# Altium PCB boitier_commande.PcbDoc
Units mm, origin at the board's own origin, x right, y up, seen from the top; angles counter-clockwise.
Board outline 299.72 x 199.9 mm, 2 copper layers (Top Layer, Bottom Layer); 59 components, 66 nets, 198 pads, 2 vias.
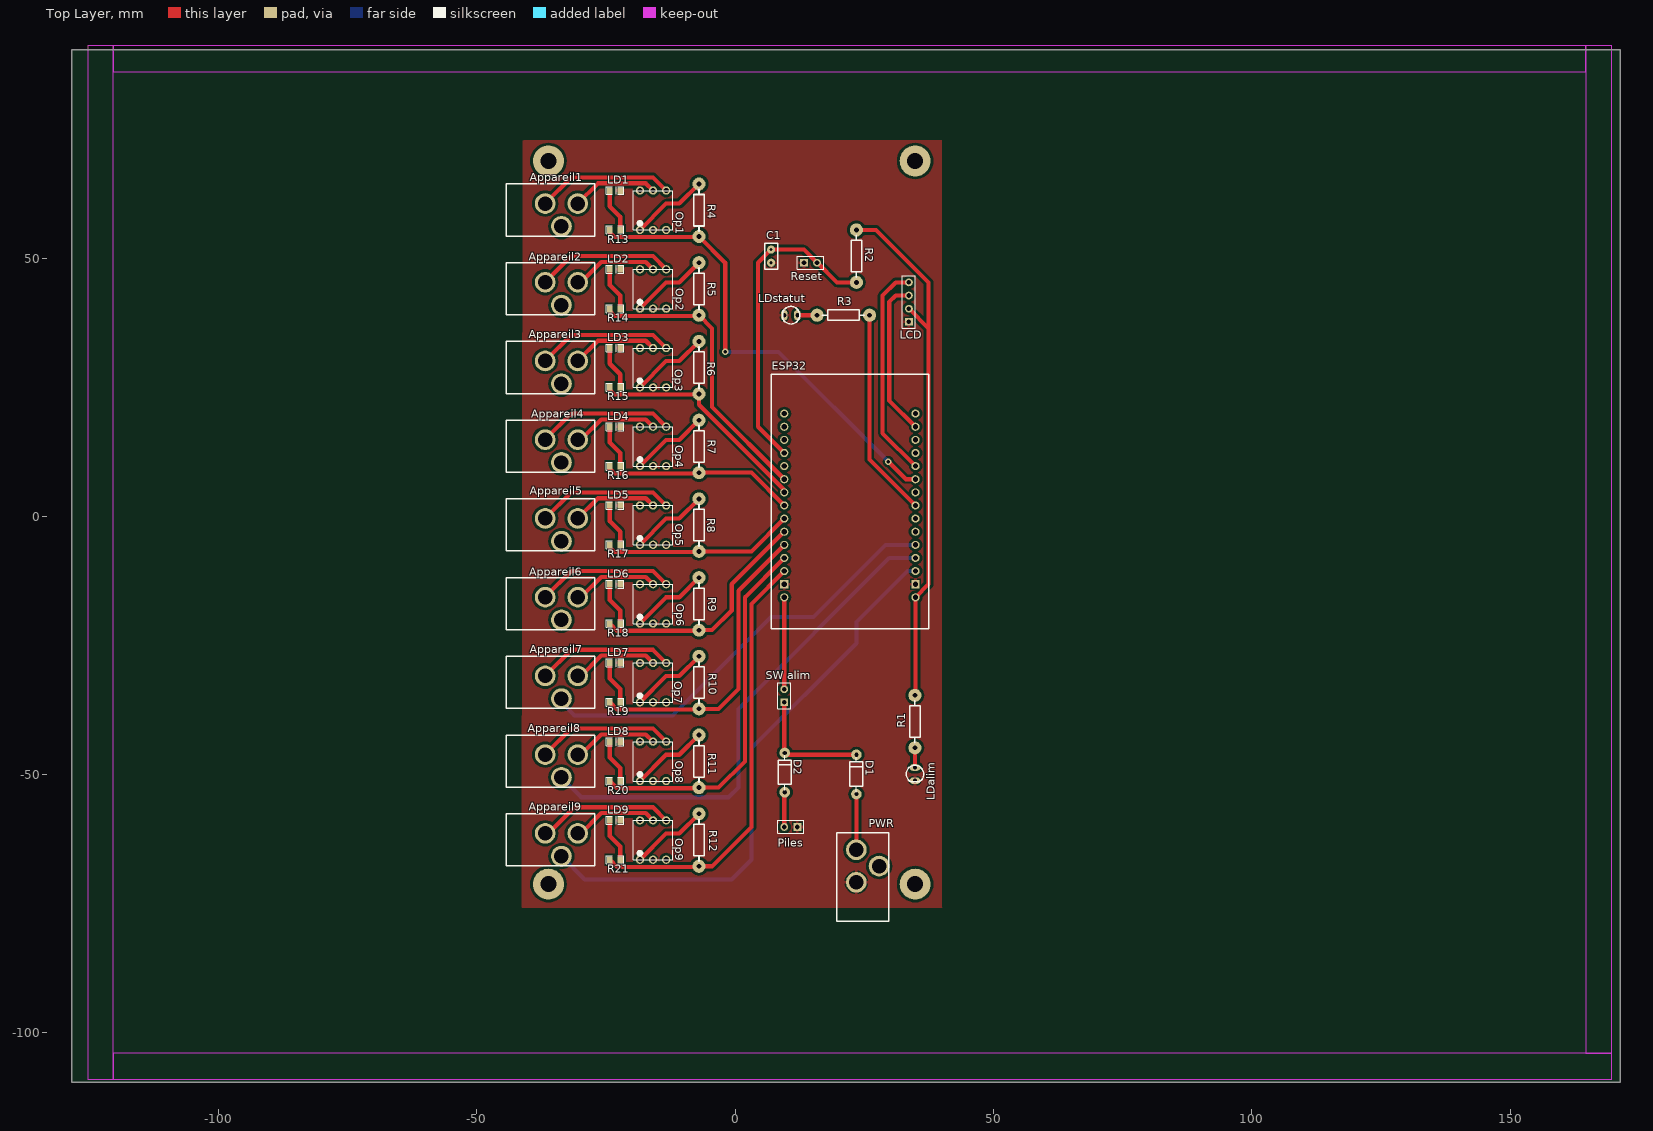
[diagram p0: Top Layer view]
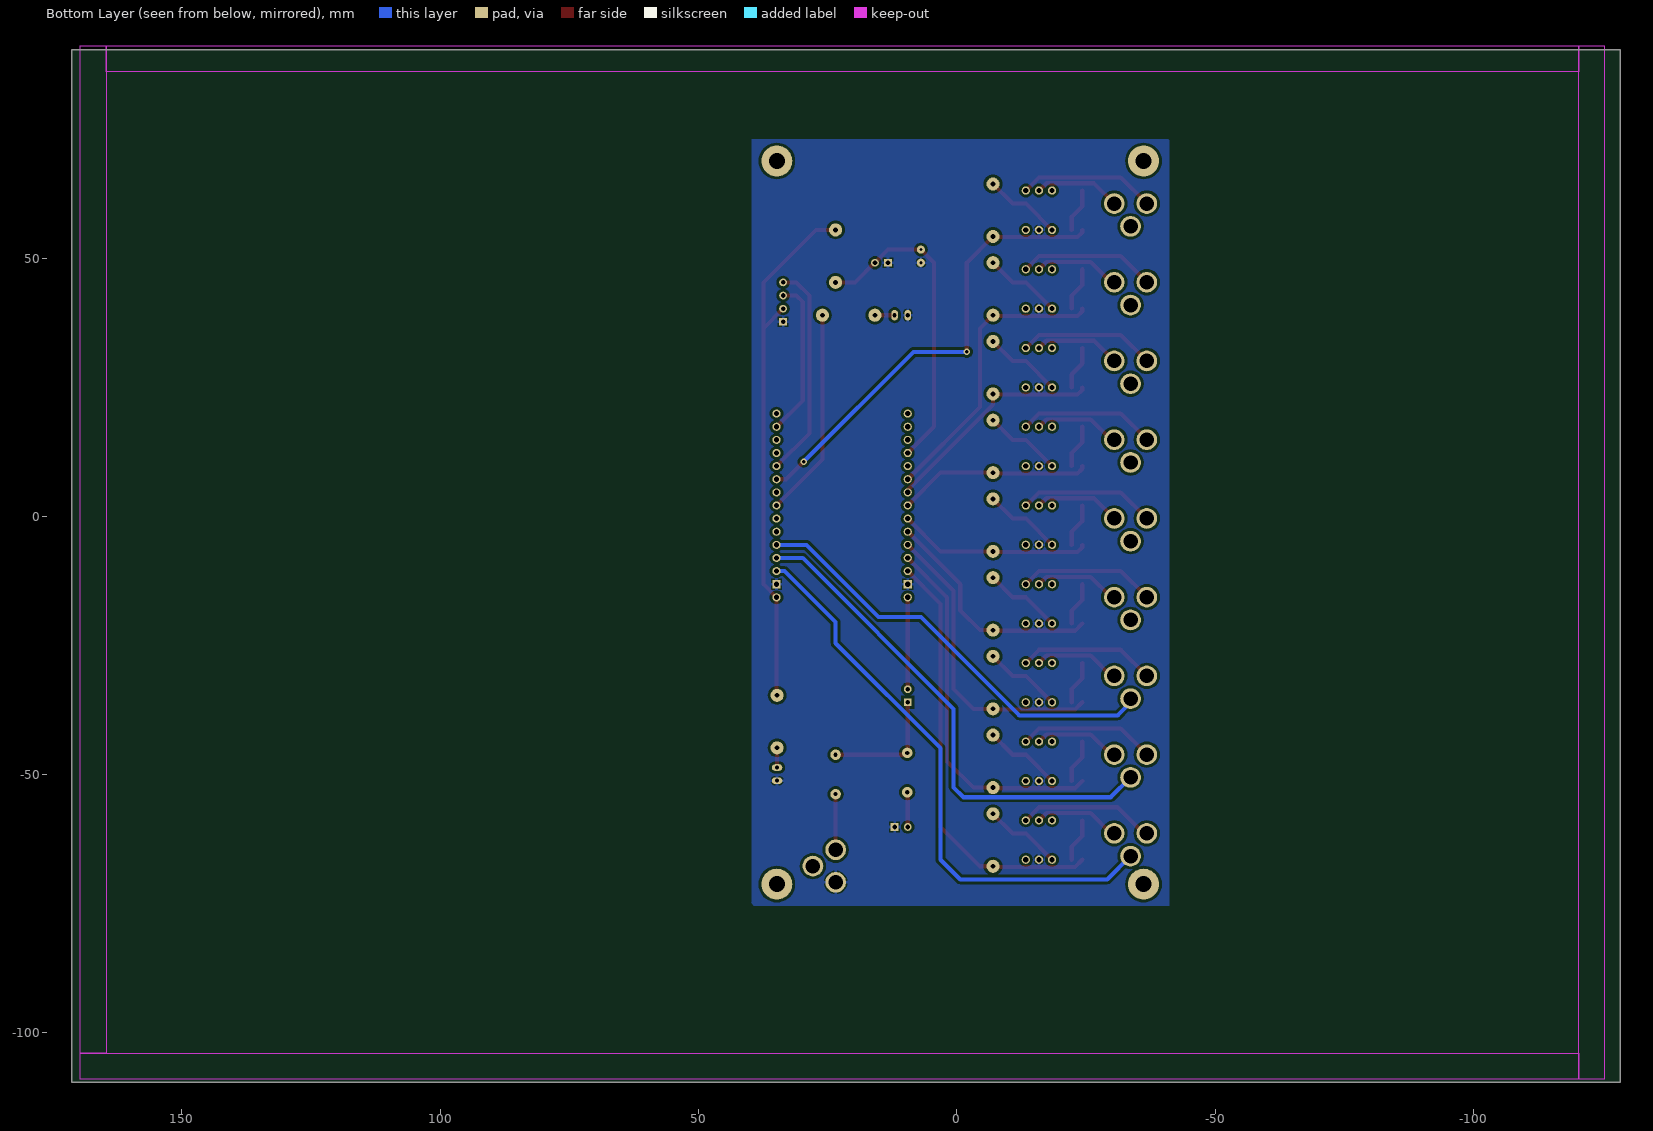
[diagram p1: Bottom Layer view, seen from below]

## Layer stack, top to bottom
Top Solder: solder mask 0.0102, Solder Resist, Dk 3.5
Top Layer: signal copper 0.0356
Dielectric1: dielectric 0.32, FR-4, Dk 4.8
Bottom Layer: signal copper 0.0356
Bottom Solder: solder mask 0.0102, Solder Resist, Dk 3.5

## Board outline
-128.405,-109.59 171.315,-109.59 171.315,90.308 -128.405,90.308

## Design rules (kind name [scope] priority, off if disabled: settings)
Clearance Clearance_bottom_polygon [OnLayer('Bottom Layer') Or OnLayer('Multi-Layer') vs OnLayer('Bottom Layer')  And  InPoly] p1: gap=0.508
Clearance Clearance_top_polygon [OnLayer('Top Layer')  Or OnLayer('Multi-Layer') vs OnLayer('Top Layer') And InPoly] p2: gap=0.508
Clearance Clearance_bottom [OnLayer('Bottom Layer') Or OnLayer('Multi-Layer') vs OnLayer('Bottom Layer')  And Not InPoly] p3: gap=0.203
Clearance Clearance_top [OnLayer('Top Layer')  Or OnLayer('Multi-Layer') vs OnLayer('Top Layer') And Not InPoly] p4: gap=0.203
Clearance Clearance_pad_to_pad [OnLayer('Multi-Layer') vs OnLayer('Multi-Layer')] p5: gap=0.254
ComponentClearance ComponentClearance_bottom [OnLayer('Bottom Overlay') vs OnLayer('Bottom Overlay')] p1: gap=0 collisioncheckmode=3 verticalgap=0.254 showdistances=FALSE
ComponentClearance ComponentClearance_top [OnLayer('Top Overlay') vs OnLayer('Top Overlay')] p2: gap=0 collisioncheckmode=3 verticalgap=0.254 showdistances=FALSE
FabricationTestPointUsage TestPointUsage [All] p1: valid=0 allowmultiple=FALSE
FabricationTestpoint Testpoint [All] p1: side=3 testpointundercomponent=TRUE minsize=1.016 maxsize=2.54 preferedsize=1.524 minholesize=0 maxholesize=1.016 preferedholesize=0.813 testpointgrid=0.025 allowsidetop=TRUE allowsidebottom=TRUE usegrid=TRUE gridtolerance=0
HoleSize [All] p1: absolutevalues=TRUE maxlimit=25.4 minlimit=0.406 maxpercent=80.000 minpercent=20.000
MinimumAnnularRing [PadXSize_AllLayers = PadYSize_AllLayers] p1: minimumring=0.254
PermittedLayers [All] p1: toplayerpermitted=TRUE bottomlayerpermitted=TRUE
PolygonConnect [All] p1: connectstyle=Relief reliefconductorwidth=0.61 reliefentries=4 polygonreliefangle="90 Angle" airgapwidth=0.254
RoutingVias [All] p1: holewidth=0.406 width=0.914 viastyle="Through Hole" minholewidth=0.406 minwidth=0.914 maxholewidth=25.4 maxwidth=25.4
SMDNeckDown [All] p1: percent=90.000
SMDToPlane [All] p1: distance=0
SolderMaskExpansion [All] p1: expansion=0.102
ViasUnderSMD [All] p1: allowed=FALSE
Width [All] p1: maxlimit=1 minlimit=0.8 preferedwidth=0.8 minimp=50.000000 maximp=50.000000 favimp=50.000000
Width Width_botom_top [OnLayer('Bottom Layer') or OnLayer('Top Layer')] p2: maxlimit=254 minlimit=0.254 preferedwidth=0.813
26 further rules are at their usual default settings.

## Components (designator, comment, footprint, x,y, rotation, side; value= is the part's Value field where it differs from the comment)
Appareil1 "Connecteur Power" "Connecteur Power" -27.325,64.34 r180 top
Appareil2 "Connecteur Power" "Connecteur Power" -27.325,49.1 r180 top
Appareil3 "Connecteur Power" "Connecteur Power" -27.325,33.86 r180 top
Appareil4 "Connecteur Power" "Connecteur Power" -27.325,18.62 r180 top
Appareil5 "Connecteur Power" "Connecteur Power" -27.325,3.38 r180 top
Appareil6 "Connecteur Power" "Connecteur Power" -27.325,-11.86 r180 top
Appareil7 "Connecteur Power" "Connecteur Power" -27.325,-27.1 r180 top
Appareil8 "Connecteur Power" "Connecteur Power" -27.325,-42.34 r180 top
Appareil9 "Connecteur Power" "Connecteur Power" -27.325,-57.58 r180 top
C1 "CAP" RAD0.1 6.965,51.64 r270 top
D1 "comment" DIODE0.4 23.47,-53.77 r90 top
D2 "comment" DIODE0.4 9.6,-53.4 r90 top
ESP32 "ESP32devKit" ESP32 9.505,19.89 r0 top
LCD "OLED LCD" HDR1X4 33.635,37.67 r90 top
LD1 "comment" LED0805 -22.245,63.07 r180 top
LD2 "comment" LED0805 -22.245,47.83 r180 top
LD3 "comment" LED0805 -22.245,32.59 r180 top
LD4 "comment" LED0805 -22.245,17.35 r180 top
LD5 "comment" LED0805 -22.245,2.11 r180 top
LD6 "comment" LED0805 -22.245,-13.13 r180 top
LD7 "comment" LED0805 -22.245,-28.37 r180 top
LD8 "comment" LED0805 -22.245,-43.61 r180 top
LD9 "comment" LED0805 -22.245,-58.85 r180 top
LDalim "comment" LED3 34.8,-51.16 r0 top
LDstatut "comment" LED3 9.505,38.94 r270 top
Op1 "Optocoupler" 4N26 -15.895,59.26 r90 top
Op2 "Optocoupler" 4N26 -15.895,44.02 r90 top
Op3 "Optocoupler" 4N26 -15.895,28.78 r90 top
Op4 "Optocoupler" 4N26 -15.895,13.54 r90 top
Op5 "Optocoupler" 4N26 -15.895,-1.7 r90 top
Op6 "Optocoupler" 4N26 -15.895,-16.94 r90 top
Op7 "Optocoupler" 4N26 -15.895,-32.18 r90 top
Op8 "Optocoupler" 4N26 -15.895,-47.42 r90 top
Op9 "Optocoupler" 4N26 -15.895,-62.66 r90 top
Piles "Header 2" HDR1X2 12.045,-60.12 r180 top
PWR "Connecteur Power" "Connecteur Power" 19.665,-61.39 r270 top
R1 "RES" AXIAL0.4 34.8,-44.81 r90 top
R2 "RES" AXIAL0.4 23.475,55.45 r270 top
R3 "RES" AXIAL0.4 15.855,38.94 r0 top
R4 "RES" AXIAL0.4 -7.005,54.18 r90 top
R5 "RES" AXIAL0.4 -7.005,38.94 r90 top
R6 "RES" AXIAL0.4 -7.005,23.7 r90 top
R7 "RES" AXIAL0.4 -7.005,8.46 r90 top
R8 "RES" AXIAL0.4 -7.005,-6.78 r90 top
R9 "RES" AXIAL0.4 -7.005,-22.02 r90 top
R10 "RES" AXIAL0.4 -7.005,-37.26 r90 top
R11 "RES" AXIAL0.4 -7.005,-52.5 r90 top
R12 "RES" AXIAL0.4 -7.005,-67.74 r90 top
R13 "RES" 0805 -22.245,55.45 r180 top
R14 "RES" 0805 -22.245,40.21 r180 top
R15 "RES" 0805 -22.245,24.97 r180 top
R16 "RES" 0805 -22.245,9.73 r180 top
R17 "RES" 0805 -22.245,-5.51 r180 top
R18 "RES" 0805 -22.245,-20.75 r180 top
R19 "RES" 0805 -22.245,-35.99 r180 top
R20 "RES" 0805 -22.245,-51.23 r180 top
R21 "RES" 0805 -22.245,-66.47 r180 top
Reset "Header 2" HDR1X2 13.315,49.1 r0 top
"SW alim" "Header 2" HDR1X2 9.505,-35.99 r90 top

## Footprints (in the part's own frame and the unit in brackets; to place one, negate y for a bottom-side part, rotate by r counter-clockwise, add the part's x,y. Pads: shape width x height; smd on the part's side, far side on the other; paste and mask are expansions set on the pad)
4N26 [mm]
  round 1.6 hole 1: 1(-3.81,2.54) 2(-3.81,0) 3(-3.81,-2.54) 4(3.81,-2.54) 5(3.81,0) 6(3.81,2.54)
  silkscreen extent -3.81,-3.81 3.81,3.81
0805 [mil]
  rect 40x50 smd: 1(0,0) 2(80,0)
  silkscreen extent -25,-30 105,30
AXIAL0.4 [mil]
  round 100 hole 36: 1(0,0) 2(400,0)
  silkscreen extent 40,-40 360,40
"Connecteur Power" [mm]
  round 4 hole 2.8: 0(3.15,3.78) 1(9.45,3.78) 2(6.3,8.19)
  silkscreen extent -0.13,0 17.01,10.08
DIODE0.4 [mil]
  round 80 hole 32: 1(0,0) 2(300,0)
  silkscreen extent 15,-50 280,50
ESP32 [mm]
  round 1.575 hole 1.016: 0(0,0) 1(0,-2.54) 2(0,-5.08) 3(0,-7.62) 4(0,-10.16) 5(0,-12.7) 6(0,-15.24) 7(0,-17.78) 8(0,-20.32) 9(0,-22.86) 10(0,-25.4) 11(0,-27.94) 12(0,-30.48) 14(0,-35.56) 15(25.4,-35.56) 17(25.4,-30.48) 18(25.4,-27.94) 19(25.4,-25.4) 20(25.4,-22.86) 21(25.4,-20.32) 22(25.4,-17.78) 23(25.4,-15.24) 24(25.4,-12.7) 25(25.4,-10.16) 26(25.4,-7.62) 27(25.4,-5.08) 28(25.4,-2.54) 29(25.4,0)
  rect 1.575x1.575 hole 1.016: 13(0,-33.02) 16(25.4,-33.02)
  silkscreen extent -2.54,-41.66 27.94,7.62
HDR1X2 [mm] "Connector; Header; 2 Position"
  rect 1.5x1.5 hole 0.9: 1(0,0)
  round 1.5 hole 0.9: 2(2.54,0)
  silkscreen extent -1.27,-1.27 3.81,1.27
HDR1X4 [mm] "Connector; Header; 4 Position"
  rect 1.5x1.5 hole 0.9: 1(0,0)
  round 1.5 hole 0.9: 2(2.54,0) 3(5.08,0) 4(7.62,0)
  silkscreen extent -1.27,-1.27 8.89,1.27
LED3 [mil] "3mm LED"
  oval 80x50 hole 32: A(0,100) K(0,0)
  silkscreen extent -67,-10 67,117
LED0805 [mil]
  rect 40x50 smd: A(80,0) K(0,0)
  silkscreen extent -25,-30 105,30
RAD0.1 [mil]
  round 62 hole 24: 1(0,0) 2(100,0)
  silkscreen extent -50,-50 150,50

## Part data
C1: "capacité non polarisée"
D1 D2: library part DIODE_schottky, "diode schottky standard"
LCD: library part "Header 4", "Header, 4-Pin"
LD1 LD2 LD3 LD4 LD5 LD6 LD7 LD8 LD9 LDalim LDstatut: library part LED, "LED 5mm/3mm/CMS"
Piles Reset "SW alim": "Header, 2-Pin"
R1 R2 R3 R4 R5 R6 R7 R8 R9 R10 R11 R12 R13 R14 R15 R16 R17 R18 R19 R20 R21: "resistance"

## Free pads (board coordinates)
  round 6 hole 3.1: 0(-36.15,-71.2) 0(-36.15,68.8) 0(34.85,-71.2) 0(34.85,68.8)

## Via types
v1: diameter 1.27, hole 0.711, Top Layer to Bottom Layer, 2 vias

## Nets (pads, with @x,y where several pads share a name; then routed paths per layer and width w, separated by ;. In a path a pad name is that pad's centre, name@x,y a point inside that pad or via, vN(x,y) a via of type N, cw(c..) or ccw(c..) an arc to the next point about the centre after c; other vN are vias at no path point)
CAMERA1: ESP32.24 R4.1 R13.2 | length 89.7
  Top Layer w0.8: R13.2@-24.282,55.45 -24.282,54.942 -23.387,54.047 -7.143,54.047 -7.01,54.18 -1.93,49.1 v1(-1.93,31.85) ; v1(29.651,10.574) 33.035,7.19 ESP32.24
  Bottom Layer w0.8: v1(-1.93,31.85) 8.375,31.85 v1(29.651,10.574)
CAMERA2: ESP32.5 R5.1 R14.2 | length 56.8
  Top Layer w0.8: R14.2@-24.282,40.21 -24.282,39.702 -23.387,38.807 -7.143,38.807 -7.01,38.94 -4.47,36.4 -4.47,21.16 ESP32.5@9.5,7.19
CAMERA3: ESP32.6 R6.1 R15.2 | length 44.1
  Top Layer w0.8: R15.2@-24.282,24.97 -24.282,24.462 -23.387,23.567 -7.143,23.567 -7.01,23.7 -7.01,21.61 9.5,5.1 ESP32.6@9.5,4.65
CAMERA4: ESP32.7 R7.1 R16.2 | length 37.3
  Top Layer w0.8: R16.2@-24.282,9.73 -24.282,9.222 -23.387,8.327 -7.143,8.327 -7.01,8.46 3.15,8.46 ESP32.7@9.5,2.11
CAMERA5: ESP32.8 R8.1 R17.2 | length 37.3
  Top Layer w0.8: R17.2@-24.282,-5.51 -24.282,-6.018 -23.387,-6.913 -7.143,-6.913 -7.01,-6.78 3.15,-6.78 ESP32.8@9.5,-0.43
CAMERA6: ESP32.9 R9.1 R18.2 | length 45.3
  Top Layer w0.8: R18.2@-24.282,-20.75 -22.879,-22.153 -7.143,-22.153 -7.01,-22.02 -4.47,-22.02 -0.66,-18.21 -0.66,-13.13 ESP32.9@9.5,-2.97
CAMERA7: ESP32.10 R10.1 R19.2 | length 58.7
  Top Layer w0.8: R19.2@-24.282,-35.99 -22.879,-37.393 -7.143,-37.393 -7.01,-37.26 -3.2,-37.26 0.61,-33.45 0.61,-14.4 ESP32.10@9.5,-5.51
CAMERA8: ESP32.11 R11.1 R20.2 | length 71.4
  Top Layer w0.8: R20.2@-24.282,-51.23 -22.879,-52.633 -7.143,-52.633 -7.01,-52.5 -3.2,-52.5 1.88,-47.42 1.88,-15.67 ESP32.11@9.5,-8.05
CAMERA9: ESP32.12 R12.1 R21.2 | length 83.5
  Top Layer w0.8: R21.2@-24.282,-66.47 -22.879,-67.873 -7.01,-67.873 -7.01,-67.74 -4.47,-67.74 3.15,-60.12 3.15,-16.94 ESP32.12@9.5,-10.59
GND: C1.2 ESP32.13 ESP32.16 LCD.1 LD1.K LD2.K LD3.K LD4.K LD5.K LD6.K LD7.K LD8.K LD9.K LDalim.K LDstatut.K Op1.2 Op2.2 Op3.2 Op4.2 Op5.2 Op6.2 Op7.2 Op8.2 Op9.2 Piles.1 PWR.1 Reset.1
LED: ESP32.22 R3.2 | length 40.5
  Top Layer w0.8: R3.2@26.01,38.94 26.01,11 ESP32.22@34.9,2.11
NetD1_1: D1.1 PWR.0 | length 10.8
  Top Layer w0.8: PWR.0@23.44,-64.54 23.47,-64.51 D1.1
NetD1_2: "SW alim.1" D1.2 D2.2 | length 24.1
  Top Layer w0.8: 9.5,-35.99 9.5,-46.15 D1.2
NetD2_1: D2.1 Piles.2 | length 6.3
  Top Layer w0.8: Piles.2@9.5,-60.12 D2.1@9.5,-53.77
NetLD1_A: LD1.A R13.1 | length 8.5
  Top Layer w0.8: LD1.A@-24.282,63.07 -24.282,60.022 -22.25,57.99 R13.1@-22.25,55.45
NetLD2_A: LD2.A R14.1 | length 8.5
  Top Layer w0.8: LD2.A@-24.282,47.83 -24.282,44.782 -22.25,42.75 R14.1@-22.25,40.21
NetLD3_A: LD3.A R15.1 | length 8.5
  Top Layer w0.8: LD3.A@-24.282,32.59 -24.282,29.542 -22.25,27.51 R15.1@-22.25,24.97
NetLD4_A: LD4.A R16.1 | length 8.5
  Top Layer w0.8: LD4.A@-24.282,17.35 -24.282,14.302 -22.25,12.27 R16.1@-22.25,9.73
NetLD5_A: LD5.A R17.1 | length 8.5
  Top Layer w0.8: LD5.A@-24.282,2.11 -24.282,-0.938 -22.25,-2.97 R17.1@-22.25,-5.51
NetLD6_A: LD6.A R18.1 | length 8.5
  Top Layer w0.8: LD6.A@-24.282,-13.13 -24.282,-16.178 -22.25,-18.21 R18.1@-22.25,-20.75
NetLD7_A: LD7.A R19.1 | length 8.5
  Top Layer w0.8: LD7.A@-24.282,-28.37 -24.282,-31.418 -22.25,-33.45 R19.1@-22.25,-35.99
NetLD8_A: LD8.A R20.1 | length 8.5
  Top Layer w0.8: LD8.A@-24.282,-43.61 -24.282,-46.658 -22.25,-48.69 R20.1@-22.25,-51.23
NetLD9_A: LD9.A R21.1 | length 8.5
  Top Layer w0.8: LD9.A@-24.282,-58.85 -24.282,-61.898 -22.25,-63.93 R21.1@-22.25,-66.47
NetLDalim_A: LDalim.A R1.1 | length 3.8
  Top Layer w0.8: LDalim.A@34.795,-48.62 R1.1@34.795,-44.81
NetLDstatut_A: LDstatut.A R3.1 | length 3.8
  Top Layer w0.8: LDstatut.A@12.04,38.94 R3.1@15.85,38.94
NetOp1_1: Op1.1 R4.2 | length 15.1
  Top Layer w0.8: Op1.1@-18.44,55.45 -13.36,60.53 -10.82,60.53 R4.2@-7.01,64.34
NetOp2_1: Op2.1 R5.2 | length 15.1
  Top Layer w0.8: Op2.1@-18.44,40.21 -13.36,45.29 -10.82,45.29 R5.2@-7.01,49.1
NetOp3_1: Op3.1 R6.2 | length 15.1
  Top Layer w0.8: Op3.1@-18.44,24.97 -13.36,30.05 -10.82,30.05 R6.2@-7.01,33.86
NetOp4_1: Op4.1 R7.2 | length 15.1
  Top Layer w0.8: Op4.1@-18.44,9.73 -13.36,14.81 -10.82,14.81 R7.2@-7.01,18.62
NetOp5_1: Op5.1 R8.2 | length 15.1
  Top Layer w0.8: Op5.1@-18.44,-5.51 -13.36,-0.43 -10.82,-0.43 R8.2@-7.01,3.38
NetOp6_1: Op6.1 R9.2 | length 15.1
  Top Layer w0.8: Op6.1@-18.44,-20.75 -13.36,-15.67 -10.82,-15.67 R9.2@-7.01,-11.86
NetOp7_1: Op7.1 R10.2 | length 15.1
  Top Layer w0.8: Op7.1@-18.44,-35.99 -13.36,-30.91 -10.82,-30.91 R10.2@-7.01,-27.1
NetOp8_1: Op8.1 R11.2 | length 15.1
  Top Layer w0.8: Op8.1@-18.44,-51.23 -13.36,-46.15 -10.82,-46.15 R11.2@-7.01,-42.34
NetOp9_1: Op9.1 R12.2 | length 15.1
  Top Layer w0.8: Op9.1@-18.44,-66.47 -13.36,-61.39 -10.82,-61.39 R12.2@-7.01,-57.58
RESET: C1.1 ESP32.3 R2.2 Reset.2 | length 61.6
  Top Layer w0.8: ESP32.3@9.5,12.27 4.42,17.35 4.42,49.1 6.96,51.64 13.31,51.64 Reset.2@15.85,49.1 ; Reset.2@15.893,49.143 19.745,45.29 R2.2@23.47,45.29
SCL: ESP32.28 LCD.3 | length 30.6
  Top Layer w0.8: LCD.3@33.63,42.75 31.09,42.75 29.82,41.48 29.82,22.43 ESP32.28@34.9,17.35
SDA: ESP32.25 LCD.4 | length 41.8
  Top Layer w0.8: LCD.4@33.63,45.29 31.09,45.29 28.55,42.75 28.55,16.08 ESP32.25@34.9,9.73
SIGNALAPAREIL1-1: Appareil1.0 Op1.5 | length 16.8
  Top Layer w0.8: Appareil1.0@-30.48,60.56 -26.567,64.473 -17.303,64.473 Op1.5@-15.9,63.07
SIGNALAPAREIL1-2: Appareil1.1 Op1.4 | length 26.6
  Top Layer w0.8: Appareil1.1@-36.78,60.56 -31.73,65.61 -15.9,65.61 Op1.4@-13.36,63.07
SIGNALAPAREIL2-1: Appareil2.0 Op2.5 | length 16.8
  Top Layer w0.8: Appareil2.0@-30.48,45.32 -29.84,45.32 -25.927,49.233 -17.303,49.233 Op2.5@-15.9,47.83
SIGNALAPAREIL2-2: Appareil2.1 Op2.4 | length 26.6
  Top Layer w0.8: Appareil2.1@-36.78,45.32 -31.73,50.37 -15.9,50.37 Op2.4@-13.36,47.83
SIGNALAPAREIL3-1: Appareil3.0 Op3.5 | length 16.8
  Top Layer w0.8: Appareil3.0@-30.48,30.08 -26.567,33.993 -17.303,33.993 Op3.5@-15.9,32.59
SIGNALAPAREIL3-2: Appareil3.1 Op3.4 | length 26.6
  Top Layer w0.8: Appareil3.1@-36.78,30.08 -31.73,35.13 -15.9,35.13 Op3.4@-13.36,32.59
SIGNALAPAREIL4-1: Appareil4.0 Op4.5 | length 16.8
  Top Layer w0.8: Appareil4.0@-30.48,14.84 -29.84,14.84 -25.927,18.753 -17.303,18.753 Op4.5@-15.9,17.35
SIGNALAPAREIL4-2: Appareil4.1 Op4.4 | length 26.6
  Top Layer w0.8: Appareil4.1@-36.78,14.84 -31.73,19.89 -15.9,19.89 Op4.4@-13.36,17.35
SIGNALAPAREIL5-1: Appareil5.0 Op5.5 | length 16.8
  Top Layer w0.8: Appareil5.0@-30.48,-0.4 -26.567,3.513 -17.303,3.513 Op5.5@-15.9,2.11
SIGNALAPAREIL5-2: Appareil5.1 Op5.4 | length 26.6
  Top Layer w0.8: Appareil5.1@-36.78,-0.4 -31.73,4.65 -15.9,4.65 Op5.4@-13.36,2.11
SIGNALAPAREIL6-1: Appareil6.0 Op6.5 | length 16.8
  Top Layer w0.8: Appareil6.0@-30.48,-15.64 -29.84,-15.64 -25.927,-11.727 -17.303,-11.727 Op6.5@-15.9,-13.13
SIGNALAPAREIL6-2: Appareil6.1 Op6.4 | length 26.6
  Top Layer w0.8: Appareil6.1@-36.78,-15.64 -31.73,-10.59 -15.9,-10.59 Op6.4@-13.36,-13.13
SIGNALAPAREIL7-1: Appareil7.0 Op7.5 | length 16.8
  Top Layer w0.8: Appareil7.0@-30.48,-30.88 -29.84,-30.88 -25.927,-26.967 -17.303,-26.967 Op7.5@-15.9,-28.37
SIGNALAPAREIL7-2: Appareil7.1 Op7.4 | length 26.6
  Top Layer w0.8: Appareil7.1@-36.78,-30.88 -31.73,-25.83 -15.9,-25.83 Op7.4@-13.36,-28.37
SIGNALAPAREIL8-1: Appareil8.0 Op8.5 | length 16.8
  Top Layer w0.8: Appareil8.0@-30.48,-46.12 -29.84,-46.12 -25.927,-42.207 -17.303,-42.207 Op8.5@-15.9,-43.61
SIGNALAPAREIL8-2: Appareil8.1 Op8.4 | length 26.6
  Top Layer w0.8: Appareil8.1@-36.78,-46.12 -31.73,-41.07 -15.9,-41.07 Op8.4@-13.36,-43.61
SIGNALAPAREIL9-1: Appareil9.0 Op9.5 | length 16.8
  Top Layer w0.8: Appareil9.0@-30.48,-61.36 -29.84,-61.36 -25.927,-57.447 -17.303,-57.447 Op9.5@-15.9,-58.85
SIGNALAPAREIL9-2: Appareil9.1 Op9.4 | length 26.6
  Top Layer w0.8: Appareil9.1@-36.78,-61.36 -36.19,-61.36 -31.14,-56.31 -15.9,-56.31 Op9.4@-13.36,-58.85
TOUCH1: Appareil1.2
TOUCH2: Appareil2.2
TOUCH3: Appareil3.2
TOUCH4: Appareil4.2
TOUCH5: Appareil5.2
TOUCH6: Appareil6.2
TOUCH7: Appareil7.2 ESP32.19 | length 84
  Bottom Layer w0.8: Appareil7.2@-33.63,-35.29 -33.63,-36.04 -31.14,-38.53 -12.09,-38.53 6.96,-19.48 15.145,-19.48 29.115,-5.51 ESP32.19@34.9,-5.51
TOUCH8: Appareil8.2 ESP32.18 | length 98.2
  Bottom Layer w0.8: Appareil8.2@-33.63,-50.53 -29.787,-54.373 -1.263,-54.373 0.61,-52.5 0.61,-37.26 29.82,-8.05 ESP32.18@34.9,-8.05
TOUCH9: Appareil9.2 ESP32.17 | length 110.2
  Bottom Layer w0.8: Appareil9.2@-33.63,-65.77 -29.12,-70.28 -0.66,-70.28 3.15,-66.47 3.15,-44.88 23.47,-24.56 23.47,-20.48 33.36,-10.59 ESP32.17@34.9,-10.59
V3.3: ESP32.15 LCD.2 R1.2 R2.1 | length 104.6
  Top Layer w0.8: R2.1@23.47,55.45 27.28,55.45 37.44,45.29 37.44,36.4 ; LCD.2@33.63,40.21 37.44,36.4 ; R1.2@34.9,-34.65 34.9,-15.67 37.44,-13.13 37.44,36.4
VCC: "SW alim.2" ESP32.14 | length 17.8
  Top Layer w0.8: 9.5,-33.45 ESP32.14@9.5,-15.67
pads on no net: ESP32.0 ESP32.1 ESP32.2 ESP32.4 ESP32.20 ESP32.21 ESP32.23 ESP32.26 ESP32.27 ESP32.29 Op1.3 Op1.6 Op2.3 Op2.6 Op3.3 Op3.6 Op4.3 Op4.6 Op5.3 Op5.6 Op6.3 Op6.6 Op7.3 Op7.6 Op8.3 Op8.6 Op9.3 Op9.6 PWR.2

## Polygon pours and split planes (outlines as drawn)
GND on Bottom Layer "Top Layer-No Net" (solid, pour order 4): -41.075,72.85 -40.925,73 39.675,73 39.675,-74.7 39.8,-74.825 39.275,-75.35 -41.075,-75.35
GND on Top Layer "Top Layer-No Net" (solid, pour order 6): -41.325,-75.75 40.2,-75.75 39.95,-75.5 39.95,72.85 -40.95,72.85 -41.075,72.725

## Keep-outs
Keep-Out Layer:
  rectangle: -120.345,86.07 164.655,91.07
  rectangle: 164.655,-103.93 169.655,91.07
  rectangle: -120.345,-108.93 169.655,-103.93
  rectangle: -125.345,-108.93 -120.345,91.07

## Silkscreen, mask and mechanical layers (free items; w line width, h text height)
Top Overlay:
  text "Les bandes en violet delimitent la surface utilisable...." at -131.657,116.632 h6.35
  text "Mais vous n'etes pas obliges de tout utiliser!!" at -115.401,106.345 h6.35
Mechanical 1:
  lines w0.8: -41.15,-75.2 39.85,-75.2 39.85,73.23 -41.15,73.23 -41.15,-75.2